# Altium PCB 12.4呼叫器.PcbDoc (part 1 of 5)
Units mm, origin at the board's own origin, x right, y up, seen from the top; angles counter-clockwise.
Board outline 60 x 92 mm, 2 copper layers (Top Layer, Bottom Layer); 66 components, 44 nets, 270 pads, 58 vias.
Unrouted connection lines stored in the file: 4.
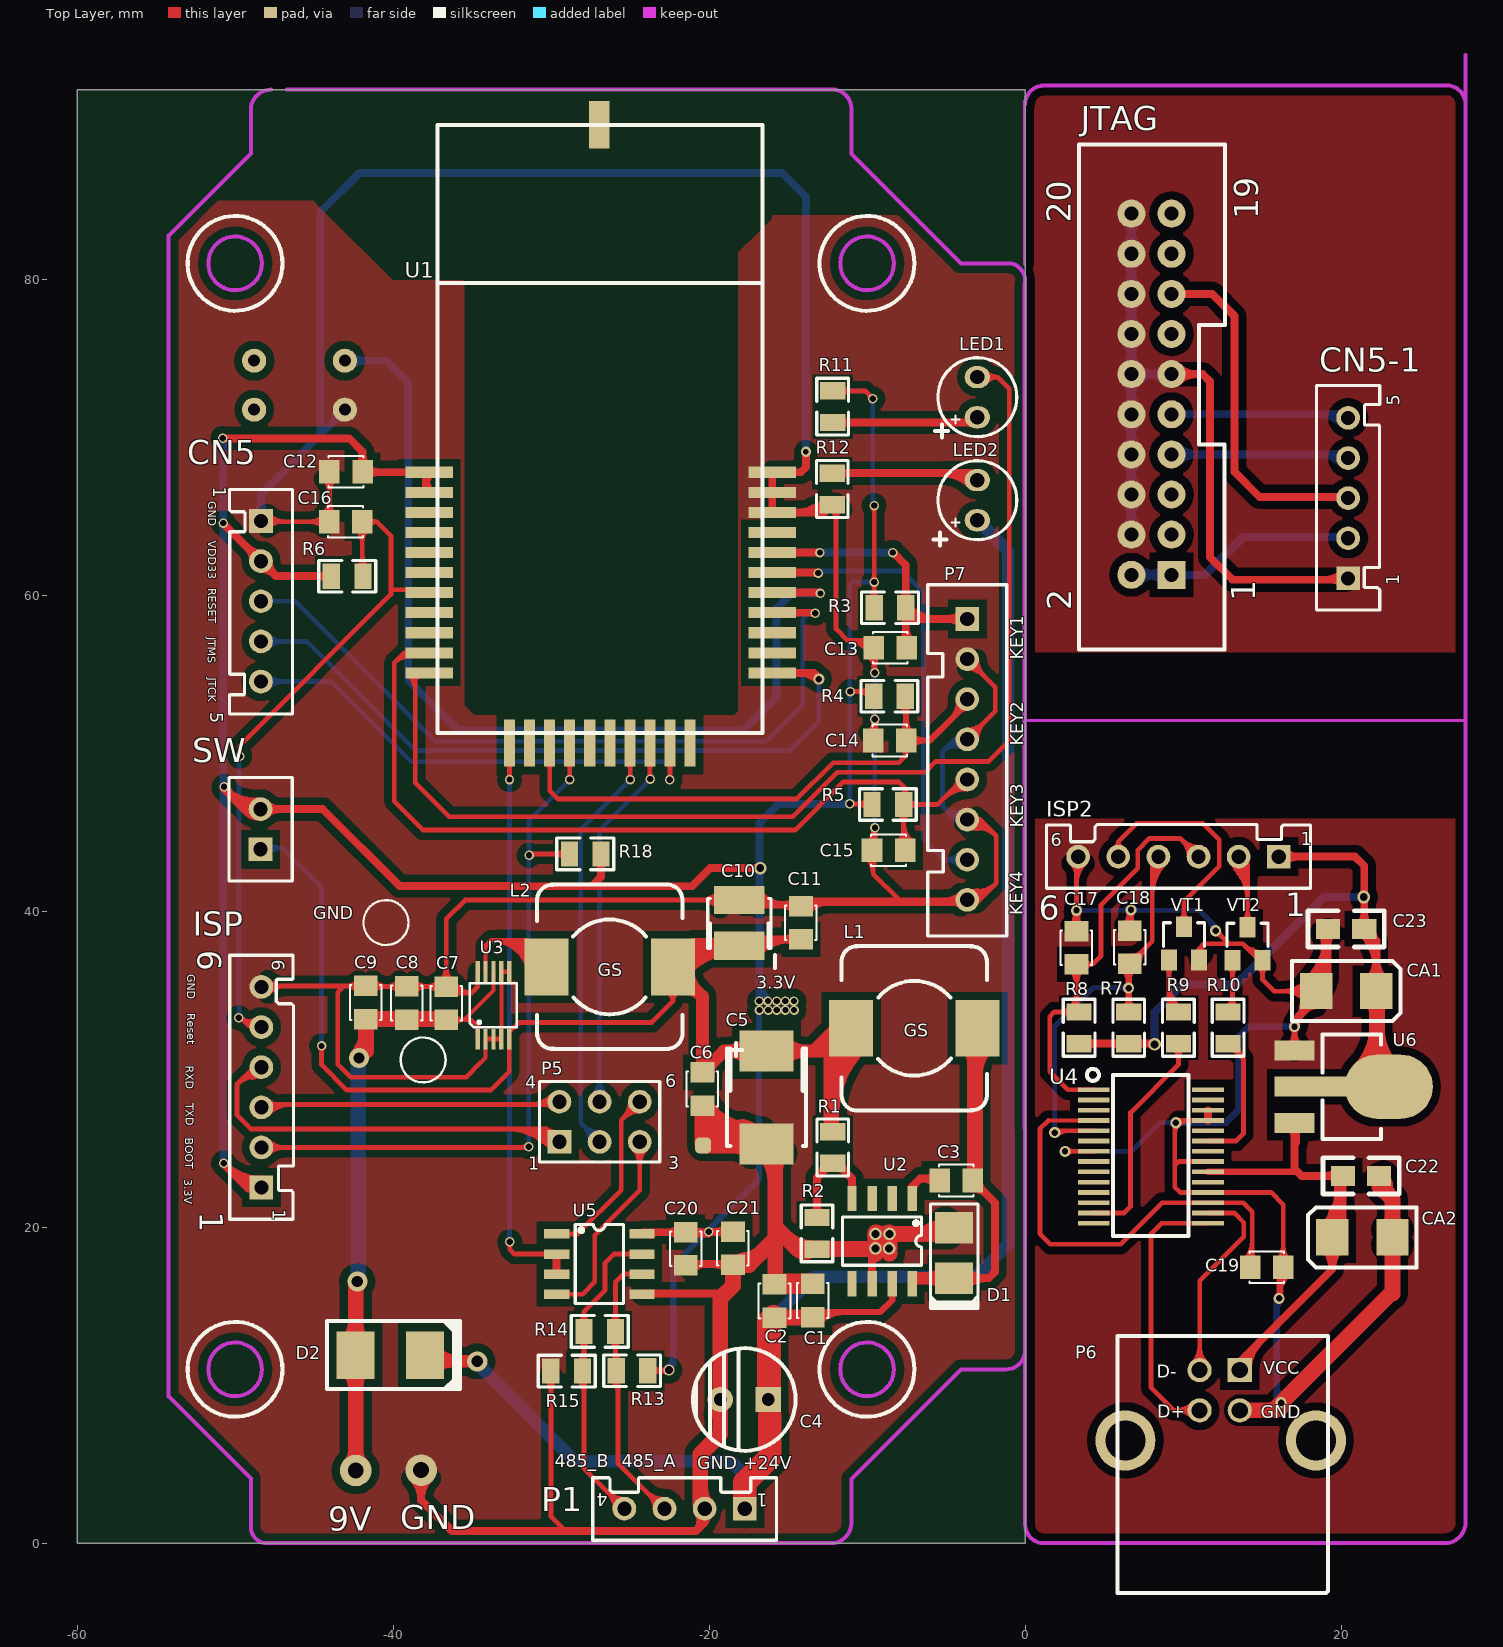
[diagram p0: Top Layer view]
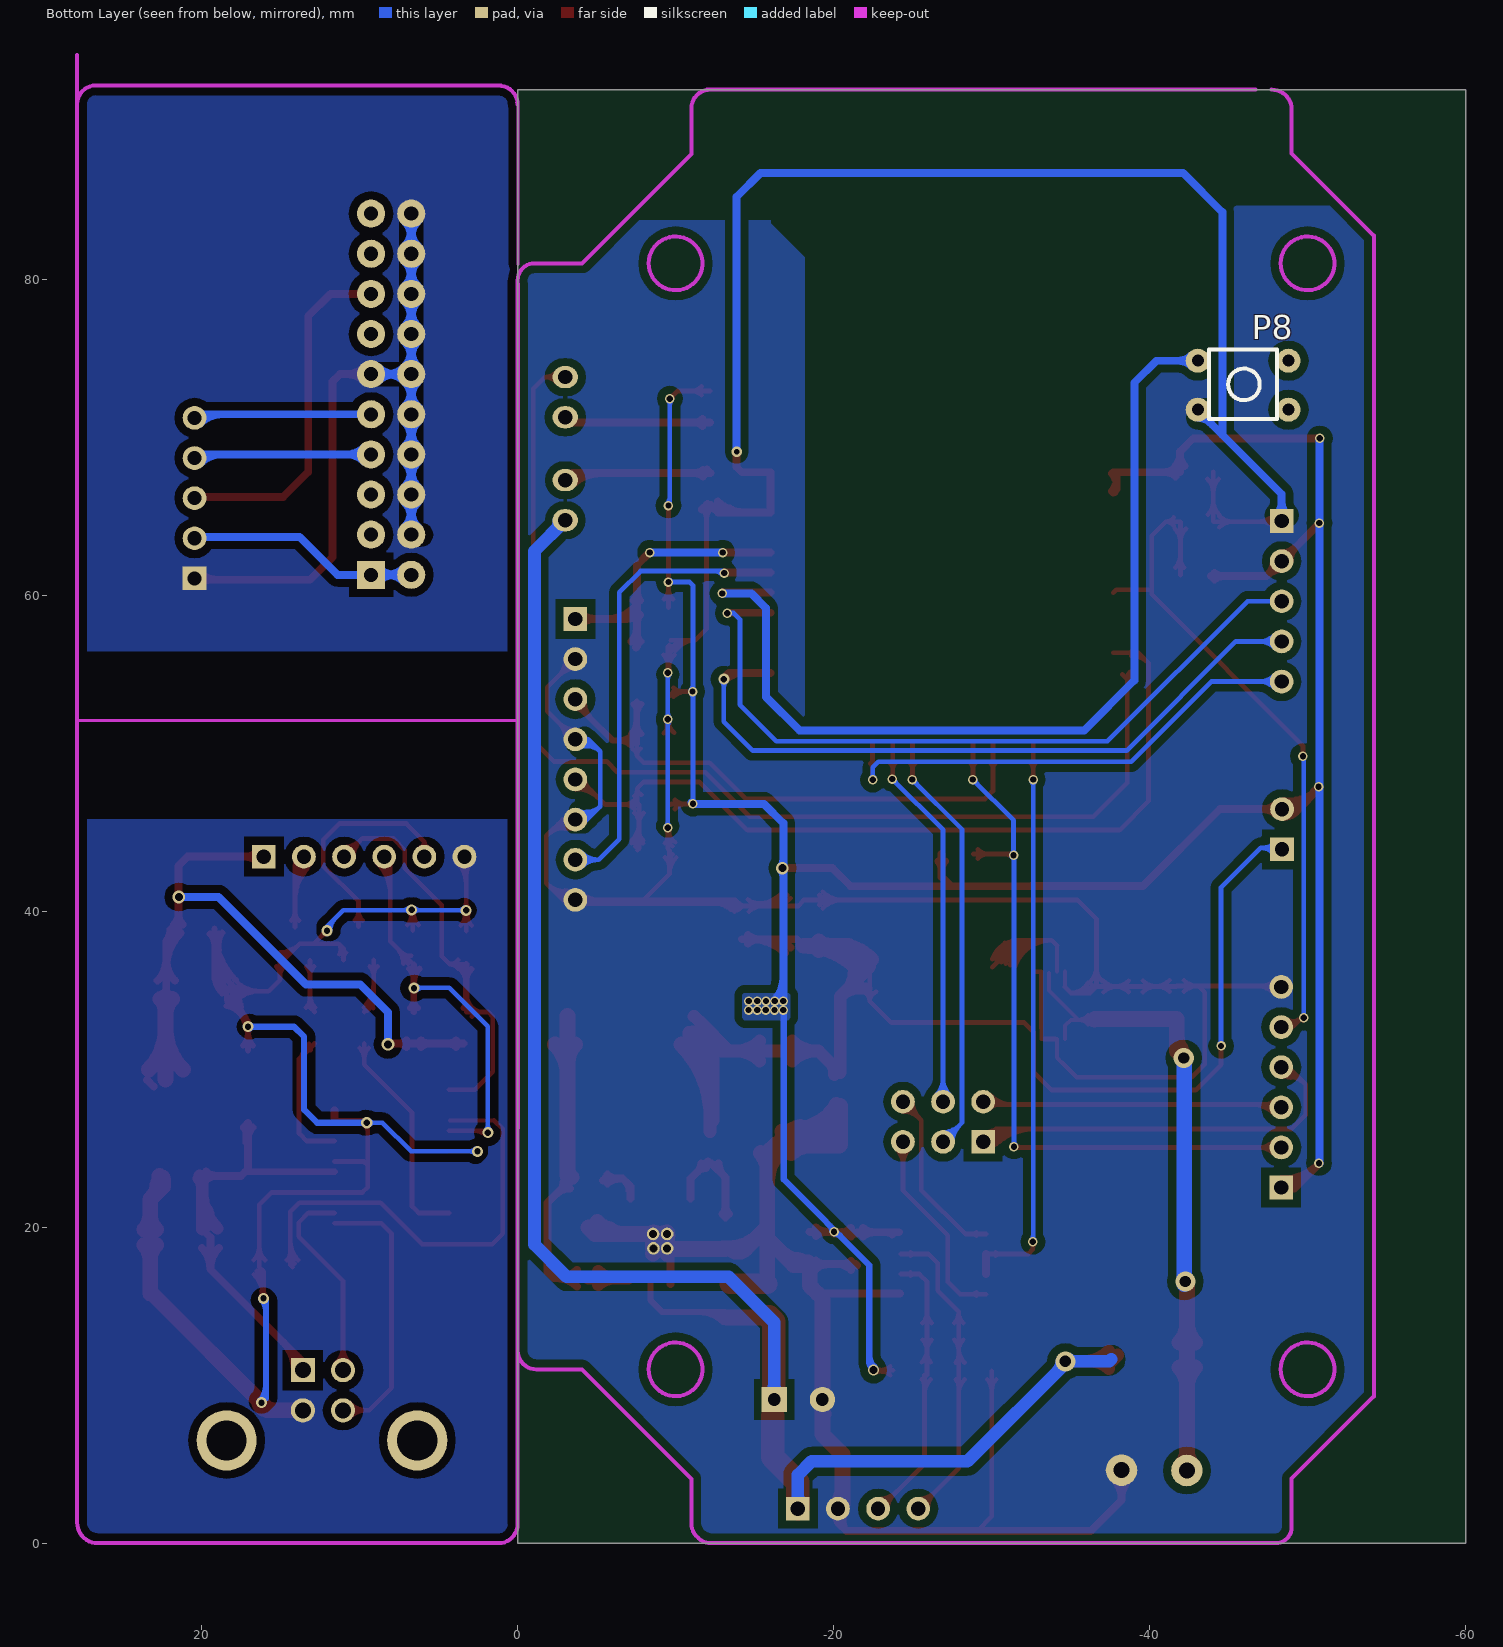
[diagram p1: Bottom Layer view, seen from below]

## Layer stack, top to bottom
Top Solder: solder mask 0.0102, Solder Resist, Dk 3.5
Top Layer: signal copper 0.0356
Dielectric1: dielectric 0.32, FR-4, Dk 4.8
Bottom Layer: signal copper 0.0356
Bottom Solder: solder mask 0.0102, Solder Resist, Dk 3.5

## Board outline
-60,0 0,0 0,92 -60,92

## Design rules (kind name [scope] priority, off if disabled: settings)
Clearance Clearance_1 [InComponent('U3')] p1: gap=0.2
Clearance leigerule [InPolygon] p2: gap=0.5
Clearance [All] p3: gap=0.24
FabricationTestPointUsage TestPointUsage [All] p1: valid=0 allowmultiple=FALSE
FabricationTestpoint Testpoint [All] p1: side=3 testpointundercomponent=TRUE minsize=1.016 maxsize=2.54 preferedsize=1.524 minholesize=0 maxholesize=1.016 preferedholesize=0.813 testpointgrid=0.025 allowsidetop=TRUE allowsidebottom=TRUE usegrid=TRUE gridtolerance=0
PolygonConnect [All] p1: connectstyle=Direct reliefconductorwidth=0.5 reliefentries=4 polygonreliefangle="90 Angle" airgapwidth=0.254
RoutingVias [All] p1: holewidth=0.711 width=1.27 viastyle="Through Hole" minholewidth=0.711 minwidth=1.27 maxholewidth=0.711 maxwidth=1.27
SolderMaskExpansion [All] p1: expansion=0.102
Width [All] p1: maxlimit=2 minlimit=0.254 preferedwidth=0.3 minimp=50.000000 maximp=50.000000 favimp=50.000000
27 further rules are at their usual default settings.

## Components (designator, comment, footprint, x,y, rotation, side; value= is the part's Value field where it differs from the comment)
C1 "4.7μF/10%/0805" C-0805 -14.33,17.06 r270 top
C2 "4.7μF/10%/0805" C-0805 -16.76,17.03 r270 top
C3 "0.01μF/10%/0805" C-0805 -6.06,22.05 r0 top
C4 "35V220μF" CZ3.0/6.5 -17.77,9.09 r0 top
C5 "476C" C-TAN-D -18.86,32.45 r270 top
C6 "0.1μf/10%/0805" C-0805 -19.52,27.04 r90 top
C7 "4.7μF/10%/0805" C-0805 -37.538,35.876 r270 top
C8 "4.7μF/10%/0805" C-0805 -40.03,35.89 r270 top
C9 "4.7μF/10%/0805" C-0805 -42.621,35.916 r270 top
C10 "47uF/20%/10V/B" C-TAN-B -16.078,36.906 r90 top
C11 "0.1μf/10%/0805" C-0805 -15.088,40.97 r270 top
C12 "0.1uf/10%/0805" C-0805 -44.679,66.904 r0 top
C13 "0.1uf/10%/0805" C-0805 -10.236,55.778 r0 top
C14 "0.1uf/10%/0805" C-0805 -10.26,49.9 r0 top
C15 "0.1uf/10%/0805" C-0805 -10.338,42.951 r0 top
C16 "0.1uf/10%/0805" C-0805 -44.704,63.754 r0 top
C17 "100pf/10%/0805" C-0805 2.35,39.39 r270 top
C18 "100pf/10%/0805" C-0805 5.73,39.42 r270 top
C19 "0.1μf/10%/0805" C-0805 16.993,18.364 r180 top
C20 "0.1uf/10%/0805" C-0805 -20.58,16.93 r90 top
C21 "1uf/10%/0805" C-0805 -17.59,16.96 r90 top
C22 "0.1uF" C0805 19.87,23.25 r180 top
C23 "0.1uF" C0805 21.72,38.88 r0 top
CA1 "4.7UF/16V" 3528 22.49,32.27 r0 top
CA2 "10UF/16V" 3528 19.19,22.03 r180 top
CN5 "1*5/白色排针座" PIN-S-2.54-1*5 -48.362,64.694 r270 top
CN5-1 "1*5/排针座" PIN-S-2.54-1*5 20.447,61.062 r90 top
D1 "1N5408/SMA" "SMA 2+" -6.04,21.51 r270 top
D2 "SS34" SMB -43.688,9.804 r0 top
ISP "1*6/排针" PIN-S-2.54-1*6 -48.336,22.504 r90 top
ISP2 "1*6/排针座" PIN-S-2.54-1*6 16.06,43.45 r180 top
JTAG "2*10/排针" IDC-20 9.27,61.264 r90 top
L1 "15μH" GSDS104C2 -7.01,32.588 r270 top
L2 "15μH" GSDS104C2 -26.289,36.474 r90 top
LED1 "green LED" LED-φ3 -3.02,72.53 r90 top
LED2 "red LED" LED-φ3 -3.02,66.01 r90 top
P1 "1*4/2.54排针" PIN-S-2.54-1*4 -17.74,2.18 r180 top
P5 "2*3排针" HDR2X3_CEN -29.47,25.4 r0 top
P6 "1*4/2.54排针" USB_B_90D 13.614,10.973 r270 top locked
P7 "Header 8" HDR1X8 -3.658,58.496 r270 top (schematic designator P6)
P8 "KEY" KEY-DIP -45.974,73.33 r180 bottom
R1 "10K" R-0805 -11.278,23.546 r90 top
R2 "5.9K/1%" R-0805 -14.07,21.11 r270 top
R3 "10K/5%/0805" R-0805 -7.05,60.11 r180 top
R4 "10K/5%/0805" R-0805 -7.087,54.508 r180 top
R5 "10K/5%/0805" R-0805 -7.188,47.65 r180 top
R6 "10K/5%/0805" R-0805 -41.402,62.103 r180 top
R7 "3.3K/5%/0805" R-0805 5.663,34.12 r270 top
R8 "3.3K/5%/0805" R-0805 2.52,34.12 r270 top
R9 "1K/5%/0805" R-0805 8.807,34.12 r270 top
R10 "1K/5%/0805" R-0805 11.95,34.12 r270 top
R11 "510Ω/5%/0805" R-0805 -13.08,73.43 r270 top
R12 "4.7K/5%/0805" R-0805 -11.31,65.22 r90 top
R13 "3.3K/5%/0805" R-0805 -26.37,10.01 r0 top
R14 "120ohm" R-0805 -28.42,12.5 r0 top
R15 "3.3K/5%/0805" R-0805 -30.51,9.99 r0 top
R18 "10K/5%/0805" R-0805 -29.337,42.723 r0 top
SW "SW-1" PIN-S-2.54-1*2 -48.387,43.917 r90 top
U1 "STM32W_108" STM32W108-3 -16.63,51.27 r90 top locked
U2 "TPS5430" SO-G8 -9.06,19.11 r180 top
U3 "TPS62056" MSOP-10 -34.648,32.006 r0 top
U4 "FT232R" SSOP-28 4.34,28.7 r0 top
U5 "MAX3485CSA" SO-G8 -26.949,17.653 r270 top
U6 "AS1117-3.3V" SOT-223 23,28.89 r270 top
VT1 "2N3904" SOT23-3 9.11,36.91 r0 top
VT2 "2N3904" SOT23-3 13.13,36.89 r0 top

## Footprints (in the part's own frame and the unit in brackets; to place one, negate y for a bottom-side part, rotate by r counter-clockwise, add the part's x,y. Pads: shape width x height; smd on the part's side, far side on the other; paste and mask are expansions set on the pad)
3528 [mil]
  rect 80.63x90 smd: 1(-10,105) 2(-160,105)
  silkscreen extent -220,30 50,180
C0805 [mil]
  rect 60x50 smd: 1(-100,0) 2(-10,0)
  silkscreen extent -150,-45 40,45
C-0805 [mm]
  rect 1.3x1.5 smd: 1(0.65,0.9) 2(2.75,0.9)
  silkscreen extent 0.6,-0.1 2.8,1.9
C-TAN-B [mm]
  rect 1.8x3.2 smd: 1(0.9,2) 2(3.8,2)
  silkscreen extent 0.75,0 3.9,4
C-TAN-D [mm]
  rect 2.6x3.4 smd: 1(1.3,2.5) 2(7.2,2.5)
  silkscreen extent 1.15,0 7.3,5
CZ3.0/6.5 [mm]
  rect 1.6x1.6 hole 0.8: 1(1.524,0)
  round 1.6 hole 0.8: 2(-1.524,0)
  silkscreen extent -3.25,-3.25 3.25,3.25
GSDS104C2 [mm]
  rect 3.6x2.8 smd: 1(0,4) 2(0,-4)
  silkscreen extent -5.2,-4.6 5.21,4.6
HDR1X8 [mm] "Connector; Header; 9 Position"
  rect 1.5x1.5 hole 0.9: 1(0,0)
  round 1.5 hole 0.9: 2(2.54,0) 3(5.08,0) 4(7.62,0) 5(10.16,0) 6(12.7,0) 7(15.24,0) 8(17.78,0)
  silkscreen extent -2.16,-2.5 20.07,2.5
HDR2X3_CEN [mm] "Connector; Header; 3x2 Position"
  rect 1.5x1.5 hole 0.9: 1(0,0)
  round 1.5 hole 0.9: 2(2.54,0) 3(5.08,0) 4(0,2.54) 5(2.54,2.54) 6(5.08,2.54)
  silkscreen extent -1.27,-1.27 6.35,3.81
IDC-20 [mil]
  rect 70x70 hole 35: 1(1,0)
  round 70 hole 35: 2(1,100) 3(101,0) 4(101,100) 5(201,0) 6(201,100) 7(301,0) 8(301,100) 9(401,0) 10(401,100) 11(501,0) 12(501,100) 13(601,0) 14(601,100) 15(701,0) 16(701,100) 17(801,0) 18(801,100) 19(901,0) 20(901,100)
  silkscreen extent -185,-133 1073,231
KEY-DIP [mil]
  round 60 hole 30: 1(-115,59.45) 2(-115,-62.6) 3(111,-62.6) 4(111,59.45)
  silkscreen extent -87,-86 83,87
LED-φ3 [mm]
  oval 1.4x1.6 hole 0.9: 1(-1.27,0) 2(1.27,0)
  silkscreen extent -2.5,-2.5 2.5,2.5
MSOP-10 [mm]
  rect 0.27x1.3 smd mask+0.05: 1(0,-0.1) 2(0.5,-0.1) 3(1,-0.1) 4(1.5,-0.1) 5(2,-0.1) 6(2,4.175) 7(1.5,4.175) 8(1,4.175) 9(0.5,4.175) 10(0,4.175)
  silkscreen extent -0.51,0.64 2.46,3.43
PIN-S-2.54-1*2 [mm]
  rect 1.5x1.5 hole 0.9: 1(0,0)
  round 1.5 hole 0.9: 2(2.54,0)
  silkscreen extent -2,-2 4.54,2
PIN-S-2.54-1*4 [mm]
  rect 1.5x1.5 hole 0.9: 1(0,0)
  round 1.5 hole 0.9: 2(2.54,0) 3(5.08,0) 4(7.62,0)
  silkscreen extent -2,-1.96 9.62,2
PIN-S-2.54-1*5 [mm]
  rect 1.5x1.5 hole 0.9: 1(0,0)
  round 1.5 hole 0.9: 2(2.54,0) 3(5.08,0) 4(7.62,0) 5(10.16,0)
  silkscreen extent -2,-2 12.22,2
PIN-S-2.54-1*6 [mm]
  rect 1.5x1.5 hole 0.9: 1(0,0)
  round 1.5 hole 0.9: 2(2.54,0) 3(5.08,0) 4(7.62,0) 5(10.16,0) 6(12.7,0)
  silkscreen extent -2,-2.03 14.7,2
R-0805 [mm]
  rect 1.1x1.6 smd: 1(0.5,0.9) 2(2.5,0.9)
  silkscreen extent -0.3,-0.1 3.3,1.9
"SMA 2+" [mm]
  rect 2x2.4 smd: 1(1.538,1.554) 2(4.738,1.554)
  silkscreen extent 0.04,0.05 6.64,3.05
SMB [mm]
  rect 2.4x3 smd: 1(1.3,2.1) 2(5.7,2.1)
  silkscreen extent -0.51,-0.05 7.92,4.24
SO-G8 [mm]
  rect 0.6x1.6 smd: 1(-1.916,-2.7) 2(-0.646,-2.7) 3(0.624,-2.7) 4(1.894,-2.7) 5(1.894,2.7) 6(0.624,2.7) 7(-0.646,2.7) 8(-1.916,2.7)
  silkscreen extent -2.51,-1.52 2.49,1.52
SOT23-3 [mm]
  rect 1x1.3 smd: 1(0,0) 2(1.9,0) 3(0.95,2.1)
  silkscreen extent -0.35,0.87 2.25,2.35
SOT-223 [mil]
  rect 50x100 smd: 1(-90.5,-234) 3(90.5,-234)
  oval 160x220 smd: 2(0,1)
  rect 50x200 smd: 2(0,-184)
  silkscreen extent -130,-164 130,-19
SSOP-28 [mm]
  rect 2x0.3 smd: 1(0,0) 2(0,-0.65) 3(0,-1.3) 4(0,-1.95) 5(0,-2.6) 6(0,-3.25) 7(0,-3.9) 8(0,-4.55) 9(0,-5.2) 10(0,-5.85) 11(0,-6.5) 12(0,-7.15) 13(0,-7.8) 14(0,-8.45) 15(7.239,-8.45) 16(7.239,-7.8) 17(7.239,-7.15) 18(7.239,-6.5) 19(7.239,-5.85) 20(7.239,-5.2) 21(7.239,-4.55) 22(7.239,-3.9) 23(7.239,-3.25) 24(7.239,-2.6) 25(7.239,-1.95) 26(7.239,-1.3) 27(7.239,-0.65) 28(7.239,0)
  silkscreen extent -0.43,-9.27 5.99,1.32
STM32W108-3 [mm]
  rect 0.7x3 smd: 1(16.51,21.074) 2(15.24,21.074) 3(13.97,21.074) 4(12.7,21.074) 5(11.43,21.074) 6(10.16,21.074) 7(8.89,21.074) 8(7.62,21.074) 9(6.35,21.074) 10(5.08,21.074) 11(3.81,21.074) 22(3.81,-0.627) 23(5.08,-0.627) 24(6.35,-0.627) 25(7.62,-0.627) 26(8.89,-0.627) 27(10.16,-0.627) 28(11.43,-0.627) 29(12.7,-0.627) 30(13.97,-0.627) 31(15.24,-0.627) 32(16.51,-0.627)
  rect 3x0.7 smd: 12(-0.627,16.002) 13(-0.627,14.732) 14(-0.627,13.462) 15(-0.627,12.192) 16(-0.627,10.922) 17(-0.627,9.652) 18(-0.627,8.382) 19(-0.627,7.112) 20(-0.627,5.842) 21(-0.627,4.572)
  rect 3x1.3 smd: ""(38.5,10.314)
  silkscreen extent 0,0 38.5,20.57
USB_B_90D [mil]
  rect 60.06x60.06 hole 40: 1(1,-1)
  round 60.06 hole 40: 2(1,-101) 3(101,-101) 4(101,-1)
  round 150 hole 100: 5(176,-286) 6(176,189)
  silkscreen extent -84,-306 556,219

## Part data
C1 C2 C3 C6 C7 C8 C9 C11 C12 C13 C14 C15 C16 C17 C18 C19 C20 C21 C22 C23: library part Cap, "Capacitor"
C4 C5: library part "Cap Pol1", "Polarized Capacitor (Radial)"
C10: library part ASC-0013BA
CA1 CA2: library part ECAP
CN5 CN5-1: library part Header1*5
D1 D2: library part "Diode 1N5408", "3 Amp Medium Power Silicon Rectifier Diode"
ISP ISP2: library part Header1*6
JTAG: library part Header2*10
L1 L2: library part Inductor, "Inductor"
LED1: library part LED
LED2: library part LED3, "Typical BLUE SiC LED"
P1 P6: library part "Header 4", "Header, 4-Pin"
P5: library part "Header 3X2A", "Header, 3-Pin, Dual row"
P7: "Header, 8-Pin"
P8: library part "Header 2", "Header, 2-Pin"
R1 R2 R3 R4 R5 R6 R12 R18: library part Res2, "Resistor"
R7 R8: library part RES_1
R9 R10 R11 R13 R14 R15: library part RES, "R"
U1: library part STM32W108-3
U5: library part MAX485CSA, "Low-Power, Slew-Rate-Limited RS-485/RS-422 Transceiver"
U6: library part AS1117
VT1 VT2: library part NPN, "NPN Transistor"

## Free pads (board coordinates)
  round 2 hole 1: 0(-38.227,4.623) 1(-42.367,4.597)
  round 0.8 hole 0.5: 0(-9.47,19.57) 1(-8.58,19.57) 2(-9.47,18.66) 3(-8.6,18.66)
  rrect50% 1x1 smd: 5(-20.38,25.17)

## Via types
v1: diameter 0.6, hole 0.4, Top Layer to Bottom Layer, 39 vias
v2: diameter 0.7, hole 0.4, Top Layer to Bottom Layer, 11 vias
v3: diameter 1.27, hole 0.711, Top Layer to Bottom Layer, 3 vias
v4: diameter 0.8, hole 0.5, Top Layer to Bottom Layer, 3 vias
v5: diameter 0.65, hole 0.35, Top Layer to Bottom Layer, 1 vias
v6: diameter 0.7, hole 0.5, Top Layer to Bottom Layer, 1 vias

## Nets (pads, with @x,y where several pads share a name; then routed paths per layer and width w, separated by ;. In a path a pad name is that pad's centre, name@x,y a point inside that pad or via, vN(x,y) a via of type N, cw(c..) or ccw(c..) an arc to the next point about the centre after c; other vN are vias at no path point)
485_A: P1.3 R13.1 R14.2 U5.6 | length 49.8
  Top Layer w0.3: R13.1@-25.92,10.64 R14.2@-25.92,13.4 -25.92,16.549 -25.44,17.029 U5.6@-24.249,17.029 ; R13.1@-25.76,10.64 -25.76,5.03 -22.91,2.18 P1.3@-22.82,2.18 ; R14.2@-26.203,12.867 cw(c-26.886,12.184) -25.92,12.184 ; R14.2@-26.203,12.867 cw(c-26.886,12.184) -25.92,12.184 ; R14.2@-26.203,12.867 cw(c-26.886,12.184) -25.92,12.184 ; R14.2@-26.203,13.933 ccw(c-26.886,14.616) -25.92,14.616 ; R14.2@-26.203,13.933 ccw(c-26.886,14.616) -25.92,14.616 ; R14.2@-26.203,13.933 ccw(c-26.886,14.616) -25.92,14.616 ; R13.1@-26.153,10.377 cw(c-27.101,9.429) -25.76,9.429 ; R13.1@-26.153,10.377 cw(c-27.101,9.429) -25.76,9.429 ; R13.1@-26.153,10.377 cw(c-27.101,9.429) -25.76,9.429 ; R13.1@-26.153,11.443 ccw(c-26.715,12.005) -25.92,12.005 ; R13.1@-26.153,11.443 ccw(c-26.715,12.005) -25.92,12.005 ; R13.1@-26.153,11.443 ccw(c-26.715,12.005) -25.92,12.005 ; -25.92,12.184 cw(c-24.954,12.184) R14.2@-25.637,12.867 ; -25.92,12.184 cw(c-24.954,12.184) R14.2@-25.637,12.867 ; -25.92,12.184 cw(c-24.954,12.184) R14.2@-25.637,12.867 ; -25.92,12.246 ccw(c-24.784,12.246) R13.1@-25.587,11.443 ; -25.92,12.246 ccw(c-24.784,12.246) R13.1@-25.587,11.443 ; -25.92,12.246 ccw(c-24.784,12.246) R13.1@-25.587,11.443 ; -25.92,14.616 ccw(c-24.954,14.616) R14.2@-25.637,13.933 ; -25.92,14.616 ccw(c-24.954,14.616) R14.2@-25.637,13.933 ; -25.92,14.616 ccw(c-24.954,14.616) R14.2@-25.637,13.933 ; -25.76,9.96 cw(c-25.17,9.96) R13.1@-25.587,10.377 ; -25.76,9.96 cw(c-25.17,9.96) R13.1@-25.587,10.377 ; -25.76,9.96 cw(c-25.17,9.96) R13.1@-25.587,10.377 ; -25.112,17.029 cw(c-25.112,16.667) U5.6@-24.855,16.923 ; -25.112,17.029 ccw(c-25.112,17.391) U5.6@-24.855,17.135 ; -25.112,17.029 ccw(c-25.112,17.391) U5.6@-24.855,17.135 ; -25.112,17.029 cw(c-25.112,16.667) U5.6@-24.855,16.923 ; -25.112,17.029 ccw(c-25.112,17.391) U5.6@-24.855,17.135 ; -25.112,17.029 cw(c-25.112,16.667) U5.6@-24.855,16.923 ; -23.998,3.268 ccw(c-22.82,4.446) P1.3@-22.82,2.78 ; -23.998,3.268 ccw(c-22.82,4.446) P1.3@-22.82,2.78 ; -23.998,3.268 ccw(c-22.82,4.446) P1.3@-22.82,2.78 ; -23.781,3.051 cw(c-24.651,2.18) P1.3@-23.42,2.18 ; -23.781,3.051 cw(c-24.651,2.18) P1.3@-23.42,2.18 ; -23.781,3.051 cw(c-24.651,2.18) P1.3@-23.42,2.18 ; -23.608,2.883 ccw(c-22.679,3.131) P1.3@-22.82,2.18 ; -23.608,2.883 ccw(c-22.679,3.131) P1.3@-22.82,2.18 ; -23.608,2.883 ccw(c-22.679,3.131) P1.3@-22.82,2.18 ; -23.486,2.756 ccw(c-22.82,3.422) P1.3@-22.82,2.48 ; -23.486,2.756 ccw(c-22.82,3.422) P1.3@-22.82,2.48 ; -23.486,2.756 ccw(c-22.82,3.422) P1.3@-22.82,2.48
485_B: P1.4 R14.1 R15.2 U5.7 | length 53.4
  Top Layer w0.3: U5.7@-24.249,18.299 -26.024,18.299 -26.594,17.729 -26.594,15.977 -27.92,14.65 R14.1@-27.92,13.4 -27.92,4.74 P1.4@-25.36,2.18 ; R15.2@-28.293,10.357 cw(c-29.193,9.457) -27.92,9.457 ; R15.2@-28.293,10.357 cw(c-29.193,9.457) -27.92,9.457 ; R15.2@-28.293,10.357 cw(c-29.193,9.457) -27.92,9.457 ; R15.2@-28.293,11.423 ccw(c-29.193,12.323) -27.92,12.323 ; R15.2@-28.293,11.423 ccw(c-29.193,12.323) -27.92,12.323 ; R15.2@-28.293,11.423 ccw(c-29.193,12.323) -27.92,12.323 ; R14.1@-28.203,12.867 cw(c-28.886,12.184) -27.92,12.184 ; R14.1@-28.203,12.867 cw(c-28.886,12.184) -27.92,12.184 ; R14.1@-28.203,12.867 cw(c-28.886,12.184) -27.92,12.184 ; R14.1@-28.203,13.933 ccw(c-28.886,14.616) -27.92,14.616 ; R14.1@-28.203,13.933 ccw(c-28.886,14.616) -27.92,14.616 ; R14.1@-28.203,13.933 ccw(c-28.886,14.616) -27.92,14.616 ; -27.92,9.892 cw(c-27.262,9.892) R15.2@-27.727,10.357 ; -27.92,9.892 cw(c-27.262,9.892) R15.2@-27.727,10.357 ; -27.92,9.892 cw(c-27.262,9.892) R15.2@-27.727,10.357 ; -27.92,11.888 ccw(c-27.262,11.888) R15.2@-27.727,11.423 ; -27.92,11.888 ccw(c-27.262,11.888) R15.2@-27.727,11.423 ; -27.92,11.888 ccw(c-27.262,11.888) R15.2@-27.727,11.423 ; -27.92,12.184 cw(c-26.954,12.184) R14.1@-27.637,12.867 ; -27.92,12.184 cw(c-26.954,12.184) R14.1@-27.637,12.867 ; -27.92,12.184 cw(c-26.954,12.184) R14.1@-27.637,12.867 ; -27.92,14.616 ccw(c-26.954,14.616) R14.1@-27.637,13.933 ; -27.92,14.616 ccw(c-26.954,14.616) R14.1@-27.637,13.933 ; -27.92,14.616 ccw(c-26.954,14.616) R14.1@-27.637,13.933 ; -26.384,3.204 cw(c-27.409,2.18) P1.4@-25.96,2.18 ; -26.384,3.204 ccw(c-25.36,4.229) P1.4@-25.36,2.78 ; -26.384,3.204 ccw(c-25.36,4.229) P1.4@-25.36,2.78 ; -26.384,3.204 cw(c-27.409,2.18) P1.4@-25.96,2.18 ; -26.384,3.204 ccw(c-25.36,4.229) P1.4@-25.36,2.78 ; -26.384,3.204 cw(c-27.409,2.18) P1.4@-25.96,2.18 ; -26.163,2.936 ccw(c-25.15,3.207) P1.4@-25.36,2.18 ; -26.163,2.936 ccw(c-25.15,3.207) P1.4@-25.36,2.18 ; -26.163,2.936 ccw(c-25.15,3.207) P1.4@-25.36,2.18 ; -26.116,2.983 cw(c-26.387,1.97) P1.4@-25.36,2.18 ; -26.116,2.983 cw(c-26.387,1.97) P1.4@-25.36,2.18 ; -26.116,2.983 cw(c-26.387,1.97) P1.4@-25.36,2.18 ; -25.112,18.299 cw(c-25.112,17.937) U5.7@-24.855,18.193 ; -25.112,18.299 ccw(c-25.112,18.661) U5.7@-24.855,18.405 ; -25.112,18.299 ccw(c-25.112,18.661) U5.7@-24.855,18.405 ; -25.112,18.299 cw(c-25.112,17.937) U5.7@-24.855,18.193 ; -25.112,18.299 ccw(c-25.112,18.661) U5.7@-24.855,18.405 ; -25.112,18.299 cw(c-25.112,17.937) U5.7@-24.855,18.193
+VBRD: CN5-1.2 JTAG.1 JTAG.2 | length 29.3
  Bottom Layer w0.5: JTAG.2@6.73,61.289 JTAG.1@9.27,61.289 11.395,61.289 13.79,63.684 20.365,63.684 CN5-1.2@20.447,63.602 ; JTAG.2@7.182,60.837 cw(c8.272,59.747) 8.272,61.289 ; JTAG.2@7.182,60.837 cw(c8.272,59.747) 8.272,61.289 ; JTAG.2@7.182,60.837 cw(c8.272,59.747) 8.272,61.289 ; JTAG.2@7.182,61.741 ccw(c8.272,62.832) 8.272,61.289 ; JTAG.2@7.182,61.741 ccw(c8.272,62.832) 8.272,61.289 ; JTAG.2@7.182,61.741 ccw(c8.272,62.832) 8.272,61.289 ; 7.727,61.289 cw(c7.727,59.747) JTAG.1@8.818,60.837 ; 7.727,61.289 ccw(c7.727,62.832) JTAG.1@8.818,61.741 ; 7.727,61.289 ccw(c7.727,62.832) JTAG.1@8.818,61.741 ; 7.727,61.289 cw(c7.727,59.747) JTAG.1@8.818,60.837 ; 7.727,61.289 ccw(c7.727,62.832) JTAG.1@8.818,61.741 ; 7.727,61.289 cw(c7.727,59.747) JTAG.1@8.818,60.837
/RESET: C16.2 CN5-1.3 ISP2.5 ISP.5 JTAG.15 R6.1 U1.7 VT1.3 | length 112
  Top Layer w0.3: v1(-49.759,33.249) v1@-49.636,33.249 ; v1(-49.708,49.809) -49.708,50.47 -40.132,60.046 -40.132,60.35 ; ISP.5@-48.336,32.664 -48.383,32.711 -49.098,32.711 ; R6.1@-41.954,61.255 C16.2@-41.954,64.654 -41.032,64.654 ; U1.7@-37.704,60.16 -37.894,60.35 -40.132,60.35 ; ISP2.5@5.9,43.45 5.9,44.406 ; VT1.3@10.06,39.01 10.06,40.616 12.294,42.85 12.294,44.526 11.278,45.542 7.036,45.542 5.9,44.406 ; v1@-49.709,33.107 cw(c-49.558,32.672) -49.328,33.071 ; v1@-49.709,33.107 cw(c-49.558,32.672) -49.328,33.071 ; v1@-49.709,33.107 cw(c-49.558,32.672) -49.328,33.071 ; v1@-49.709,33.107 cw(c-49.558,32.672) -49.328,33.071 ; v1@-49.709,33.107 cw(c-49.558,32.672) -49.328,33.071 ; v1@-49.709,33.107 cw(c-49.558,32.672) -49.328,33.071 ; v1@-49.636,33.249 ccw(c-49.102,33.783) ISP.5@-48.675,33.159 ; v1@-49.636,33.249 ccw(c-49.102,33.783) ISP.5@-48.675,33.159 ; v1@-49.636,33.249 ccw(c-49.102,33.783) ISP.5@-48.675,33.159 ; v1@-49.636,33.249 -49.098,32.711 ; -49.381,32.993 ccw(c-48.894,33.479) ISP.5@-48.506,32.912 ; -49.381,32.993 ccw(c-48.894,33.479) ISP.5@-48.506,32.912 ; -49.381,32.993 ccw(c-48.894,33.479) ISP.5@-48.506,32.912 ; -49.098,32.711 cw(c-49.098,32.538) ISP.5@-48.928,32.566 ; -49.098,32.711 ccw(c-49.098,32.912) ISP.5@-48.907,32.85 ; -49.098,32.711 ccw(c-49.098,32.912) ISP.5@-48.907,32.85 ; -49.098,32.711 cw(c-49.098,32.538) ISP.5@-48.928,32.566 ; -49.098,32.711 ccw(c-49.098,32.912) ISP.5@-48.907,32.85 ; -49.098,32.711 cw(c-49.098,32.538) ISP.5@-48.928,32.566 ; C16.2@-42.308,64.2 cw(c-43.161,63.347) -41.954,63.347 ; C16.2@-42.308,64.2 cw(c-43.161,63.347) -41.954,63.347 ; C16.2@-42.308,64.2 cw(c-43.161,63.347) -41.954,63.347 ; R6.1@-42.185,61.736 ccw(c-42.742,62.293) -41.954,62.293 ; R6.1@-42.185,61.736 ccw(c-42.742,62.293) -41.954,62.293 ; R6.1@-42.185,61.736 ccw(c-42.742,62.293) -41.954,62.293 ; -41.954,62.544 ccw(c-40.811,62.544) R6.1@-41.619,61.736 ; -41.954,62.544 ccw(c-40.811,62.544) R6.1@-41.619,61.736 ; -41.954,62.544 ccw(c-40.811,62.544) R6.1@-41.619,61.736 ; -41.954,63.347 cw(c-40.747,63.347) C16.2@-41.6,64.2 ; -41.954,63.347 cw(c-40.747,63.347) C16.2@-41.6,64.2 ; -41.954,63.347 cw(c-40.747,63.347) C16.2@-41.6,64.2 ; C16.2@-41.535,64.381 cw(c-41.032,64.054) -41.032,64.654 ; C16.2@-41.535,64.381 cw(c-41.032,64.054) -41.032,64.654 ; C16.2@-41.535,64.381 cw(c-41.032,64.054) -41.032,64.654 ; C16.2@-41.535,64.927 ccw(c-41.032,65.254) -41.032,64.654 ; C16.2@-41.535,64.927 ccw(c-41.032,65.254) -41.032,64.654 ; C16.2@-41.535,64.927 ccw(c-41.032,65.254) -41.032,64.654 ; -41.032,64.654 -40.132,63.754 -40.132,60.35 ; ISP2.5@5.639,43.99 ccw(c5.438,44.406) 5.9,44.406 ; ISP2.5@5.639,43.99 ccw(c5.438,44.406) 5.9,44.406 ; ISP2.5@5.639,43.99 ccw(c5.438,44.406) 5.9,44.406 ; 5.9,44.406 ccw(c6.362,44.406) ISP2.5@6.161,43.99 ; 5.9,44.406 ccw(c6.362,44.406) ISP2.5@6.161,43.99 ; 5.9,44.406 ccw(c6.362,44.406) ISP2.5@6.161,43.99 ; VT1.3@9.813,39.408 ccw(c9.215,40.005) 10.06,40.005 ; VT1.3@9.813,39.408 ccw(c9.215,40.005) 10.06,40.005 ; VT1.3@9.813,39.408 ccw(c9.215,40.005) 10.06,40.005 ; 10.06,40.005 ccw(c10.905,40.005) VT1.3@10.307,39.408 ; 10.06,40.005 ccw(c10.905,40.005) VT1.3@10.307,39.408 ; 10.06,40.005 ccw(c10.905,40.005) VT1.3@10.307,39.408
  Top Layer w0.5: JTAG.15@9.27,79.069 11.844,79.069 13.25,77.664 13.25,67.804 14.83,66.224 20.365,66.224 CN5-1.3@20.447,66.142
  Bottom Layer w0.3: v1(-49.759,33.249) v1@-49.759,49.809
BOOT: ISP2.2 ISP.2 R18.1 U1.15 VT2.3 | length 120.8
  Top Layer w0.3: ISP.2@-48.336,25.044 v1@-31.42,25.044 ; v1(-31.394,43.536) -31.307,43.623 R18.1@-28.837,43.623 ; v1(-28.82,48.33) U1.15@-28.82,50.641 ; VT2.3@14.08,38.99 14.08,42.89 ; ISP.2@-47.912,24.62 cw(c-46.888,23.596) -46.888,25.044 ; ISP.2@-47.912,24.62 cw(c-46.888,23.596) -46.888,25.044 ; ISP.2@-47.912,24.62 cw(c-46.888,23.596) -46.888,25.044 ; ISP.2@-47.912,25.469 ccw(c-46.888,26.493) -46.888,25.044 ; ISP.2@-47.912,25.469 ccw(c-46.888,26.493) -46.888,25.044 ; ISP.2@-47.912,25.469 ccw(c-46.888,26.493) -46.888,25.044 ; -31.905,25.044 ccw(c-31.905,25.58) v1@-31.526,25.201 ; -31.905,25.044 ccw(c-31.905,25.58) v1@-31.526,25.201 ; -31.905,25.044 ccw(c-31.905,25.58) v1@-31.526,25.201 ; v1@-31.288,43.43 cw(c-30.822,42.963) -30.822,43.623 ; v1@-31.288,43.43 cw(c-30.822,42.963) -30.822,43.623 ; v1@-31.288,43.43 cw(c-30.822,42.963) -30.822,43.623 ; -29.803,43.623 cw(c-29.803,42.657) R18.1@-29.12,43.34 ; -29.803,43.623 ccw(c-29.803,44.588) R18.1@-29.12,43.906 ; -29.803,43.623 ccw(c-29.803,44.588) R18.1@-29.12,43.906 ; -29.803,43.623 cw(c-29.803,42.657) R18.1@-29.12,43.34 ; -29.803,43.623 ccw(c-29.803,44.588) R18.1@-29.12,43.906 ; -29.803,43.623 cw(c-29.803,42.657) R18.1@-29.12,43.34 ; U1.15@-28.963,49.352 cw(c-29.31,49.005) -28.82,49.005 ; U1.15@-28.963,49.352 cw(c-29.31,49.005) -28.82,49.005 ; U1.15@-28.963,49.352 cw(c-29.31,49.005) -28.82,49.005 ; v1@-28.926,48.436 ccw(c-29.182,48.692) -28.82,48.692 ; v1@-28.926,48.436 ccw(c-29.182,48.692) -28.82,48.692 ; v1@-28.926,48.436 ccw(c-29.182,48.692) -28.82,48.692 ; -28.82,48.692 ccw(c-28.458,48.692) v1@-28.714,48.436 ; -28.82,48.692 ccw(c-28.458,48.692) v1@-28.714,48.436 ; -28.82,48.692 ccw(c-28.458,48.692) v1@-28.714,48.436 ; -28.82,49.015 cw(c-28.344,49.015) U1.15@-28.681,49.352 ; -28.82,49.015 cw(c-28.344,49.015) U1.15@-28.681,49.352 ; -28.82,49.015 cw(c-28.344,49.015) U1.15@-28.681,49.352 ; ISP2.2@13.096,43.026 cw(c10.72,40.65) 14.08,40.65 ; ISP2.2@13.096,43.026 cw(c10.72,40.65) 14.08,40.65 ; ISP2.2@13.096,43.026 cw(c10.72,40.65) 14.08,40.65 ; ISP2.2@13.308,43.238 cw(c11.444,41.374) 14.08,41.374 ; ISP2.2@13.308,43.238 cw(c11.444,41.374) 14.08,41.374 ; ISP2.2@13.308,43.238 cw(c11.444,41.374) 14.08,41.374 ; 13.359,42.628 cw(c13.856,42.958) ISP2.2@13.52,43.45 ; 13.359,42.628 cw(c13.856,42.958) ISP2.2@13.52,43.45 ; 13.359,42.628 cw(c13.856,42.958) ISP2.2@13.52,43.45 ; ISP2.2@13.365,42.87 cw(c13.246,42.427) 13.644,42.657 ; ISP2.2@13.365,42.87 cw(c13.246,42.427) 13.644,42.657 ; ISP2.2@13.365,42.87 cw(c13.246,42.427) 13.644,42.657 ; ISP2.2@13.52,43.45 cw(c12.168,42.098) 14.08,42.098 ; ISP2.2@13.52,43.45 cw(c12.168,42.098) 14.08,42.098 ; ISP2.2@13.52,43.45 cw(c12.168,42.098) 14.08,42.098 ; ISP2.2@13.52,43.45 14.08,42.89 ; 13.528,42.375 cw(c14.028,42.707) ISP2.2@13.689,43.202 ; 13.528,42.375 cw(c14.028,42.707) ISP2.2@13.689,43.202 ; 13.528,42.375 cw(c14.028,42.707) ISP2.2@13.689,43.202 ; ISP2.2@13.546,42.851 cw(c13.568,42.335) 14.015,42.593 ; ISP2.2@13.546,42.851 cw(c13.568,42.335) 14.015,42.593 ; ISP2.2@13.546,42.851 cw(c13.568,42.335) 14.015,42.593 ; 13.692,42.573 cw(c14.211,42.873) ISP2.2@13.75,43.258 ; 13.692,42.573 cw(c14.211,42.873) ISP2.2@13.75,43.258 ; 13.692,42.573 cw(c14.211,42.873) ISP2.2@13.75,43.258 ; 13.696,42.121 cw(c14.199,42.455) ISP2.2@13.858,42.955 ; 13.696,42.121 cw(c14.199,42.455) ISP2.2@13.858,42.955 ; 13.696,42.121 cw(c14.199,42.455) ISP2.2@13.858,42.955 ; ISP2.2@13.732,43.662 cw(c12.892,42.822) 14.08,42.822 ; ISP2.2@13.732,43.662 cw(c12.892,42.822) 14.08,42.822 ; ISP2.2@13.732,43.662 cw(c12.892,42.822) 14.08,42.822 ; ISP2.2@13.814,42.927 cw(c13.923,42.733) 14.08,42.89 ; ISP2.2@13.814,42.927 cw(c13.923,42.733) 14.08,42.89 ; ISP2.2@13.814,42.927 cw(c13.923,42.733) 14.08,42.89 ; VT2.3@13.833,39.388 ccw(c13.235,39.985) 14.08,39.985 ; VT2.3@13.833,39.388 ccw(c13.235,39.985) 14.08,39.985 ; VT2.3@13.833,39.388 ccw(c13.235,39.985) 14.08,39.985 ; 13.907,42.201 cw(c14.563,42.58) ISP2.2@13.981,43.066 ; 13.907,42.201 cw(c14.563,42.58) ISP2.2@13.981,43.066 ; 13.907,42.201 cw(c14.563,42.58) ISP2.2@13.981,43.066 ; 14.015,42.593 cw(c14.462,42.851) ISP2.2@14.026,43.128 ; 14.015,42.593 cw(c14.462,42.851) ISP2.2@14.026,43.128 ; 14.015,42.593 cw(c14.462,42.851) ISP2.2@14.026,43.128 ; ISP2.2@14.043,43.156 ccw(c14.237,43.047) 14.08,42.89 ; ISP2.2@14.043,43.156 ccw(c14.237,43.047) 14.08,42.89 ; ISP2.2@14.043,43.156 ccw(c14.237,43.047) 14.08,42.89 ; 14.08,39.985 ccw(c14.925,39.985) VT2.3@14.327,39.388 ; 14.08,39.985 ccw(c14.925,39.985) VT2.3@14.327,39.388 ; 14.08,39.985 ccw(c14.925,39.985) VT2.3@14.327,39.388
  Bottom Layer w0.3: v1(-31.42,25.095) -31.42,43.51 v1(-31.394,43.536) -31.394,45.756 v1(-28.82,48.33) ; v1@-31.526,25.201 ccw(c-31.782,25.457) -31.42,25.457 ; v1@-31.526,25.201 ccw(c-31.782,25.457) -31.42,25.457 ; v1@-31.526,25.201 ccw(c-31.782,25.457) -31.42,25.457 ; v1@-31.5,43.43 cw(c-31.695,43.235) -31.42,43.235 ; v1@-31.5,43.43 cw(c-31.695,43.235) -31.42,43.235 ; v1@-31.5,43.43 cw(c-31.695,43.235) -31.42,43.235 ; v1@-31.5,43.642 ccw(c-31.757,43.898) -31.394,43.898 ; v1@-31.5,43.642 ccw(c-31.757,43.898) -31.394,43.898 ; v1@-31.5,43.642 ccw(c-31.757,43.898) -31.394,43.898 ; -31.42,25.457 ccw(c-31.058,25.457) v1@-31.314,25.201 ; -31.42,25.457 ccw(c-31.058,25.457) v1@-31.314,25.201 ; -31.42,25.457 ccw(c-31.058,25.457) v1@-31.314,25.201 ; -31.42,43.112 cw(c-30.971,43.112) v1@-31.288,43.43 ; -31.42,43.112 cw(c-30.971,43.112) v1@-31.288,43.43 ; -31.42,43.112 cw(c-30.971,43.112) v1@-31.288,43.43 ; -31.394,43.898 ccw(c-31.032,43.898) v1@-31.288,43.642 ; -31.394,43.898 ccw(c-31.032,43.898) v1@-31.288,43.642 ; -31.394,43.898 ccw(c-31.032,43.898) v1@-31.288,43.642 ; -29.076,48.074 cw(c-28.82,47.818) v1@-28.82,48.18 ; -29.076,48.074 ccw(c-29.332,48.33) v1@-28.97,48.33 ; -29.076,48.074 ccw(c-29.332,48.33) v1@-28.97,48.33 ; -29.076,48.074 cw(c-28.82,47.818) v1@-28.82,48.18 ; -29.076,48.074 ccw(c-29.332,48.33) v1@-28.97,48.33 ; -29.076,48.074 cw(c-28.82,47.818) v1@-28.82,48.18
CBUS0: R10.2 U4.23 | length 10.4
  Top Layer w0.3: U4.23@11.579,25.45 13.35,25.45 13.83,25.93 13.83,30.64 ; R10.2@12.85,31.62 13.83,30.64 ; R10.2@13.1,31.22 cw(c13.1,30.858) R10.2@13.356,31.114 ; R10.2@13.199,31.61 ccw(c13.842,31.542) R10.2@13.385,31.085 ; R10.2@13.498,31.578 ccw(c14.647,31.457) 13.83,30.64
CBUS2: R9.2 U4.13 | length 18.6
  Top Layer w0.3: U4.13@4.34,20.9 6.27,20.9 6.68,21.311 6.68,27.254 9.707,30.281 R9.2@9.707,31.62 ; R9.2@9.424,31.337 cw(c8.741,30.654) 9.707,30.654 ; R9.2@9.424,31.337 cw(c8.741,30.654) 9.707,30.654 ; R9.2@9.424,31.337 cw(c8.741,30.654) 9.707,30.654 ; 9.707,30.654 cw(c10.672,30.654) R9.2@9.99,31.337 ; 9.707,30.654 cw(c10.672,30.654) R9.2@9.99,31.337 ; 9.707,30.654 cw(c10.672,30.654) R9.2@9.99,31.337
D+: P6.3 U4.15 | length 21
  Top Layer w0.3: 10.22,20.25 U4.15@11.579,20.25 8.642,20.25 7.976,19.583 7.976,9.83 9.398,8.407 P6.3@11.049,8.407 ; P6.3@10.616,7.974 ccw(c9.57,6.928) 9.57,8.407 ccw(c9.57,9.887) P6.3@10.616,8.841
D-: P6.2 U4.16 | length 15.9
  Top Layer w0.3: P6.2@10.49,10.947 P6.2@11.049,10.947 11.049,16.612 13.843,19.406 13.843,20.295 13.238,20.9 U4.16@11.579,20.9 ; P6.2@10.616,11.381 ccw(c9.57,12.427) 11.049,12.427 ccw(c12.528,12.427) P6.2@11.482,11.381